# Altium PCB OK1050-C_V1.2.PcbDoc (part 1 of 3)
Units mm, origin at the board's own origin, x right, y up, seen from the top; angles counter-clockwise.
Board outline 103.88 x 80.73 mm, 2 copper layers (Component Side, Bottom Layer), stack 0.325 mm thick; 231 components, 276 nets, 1026 pads, 717 vias.
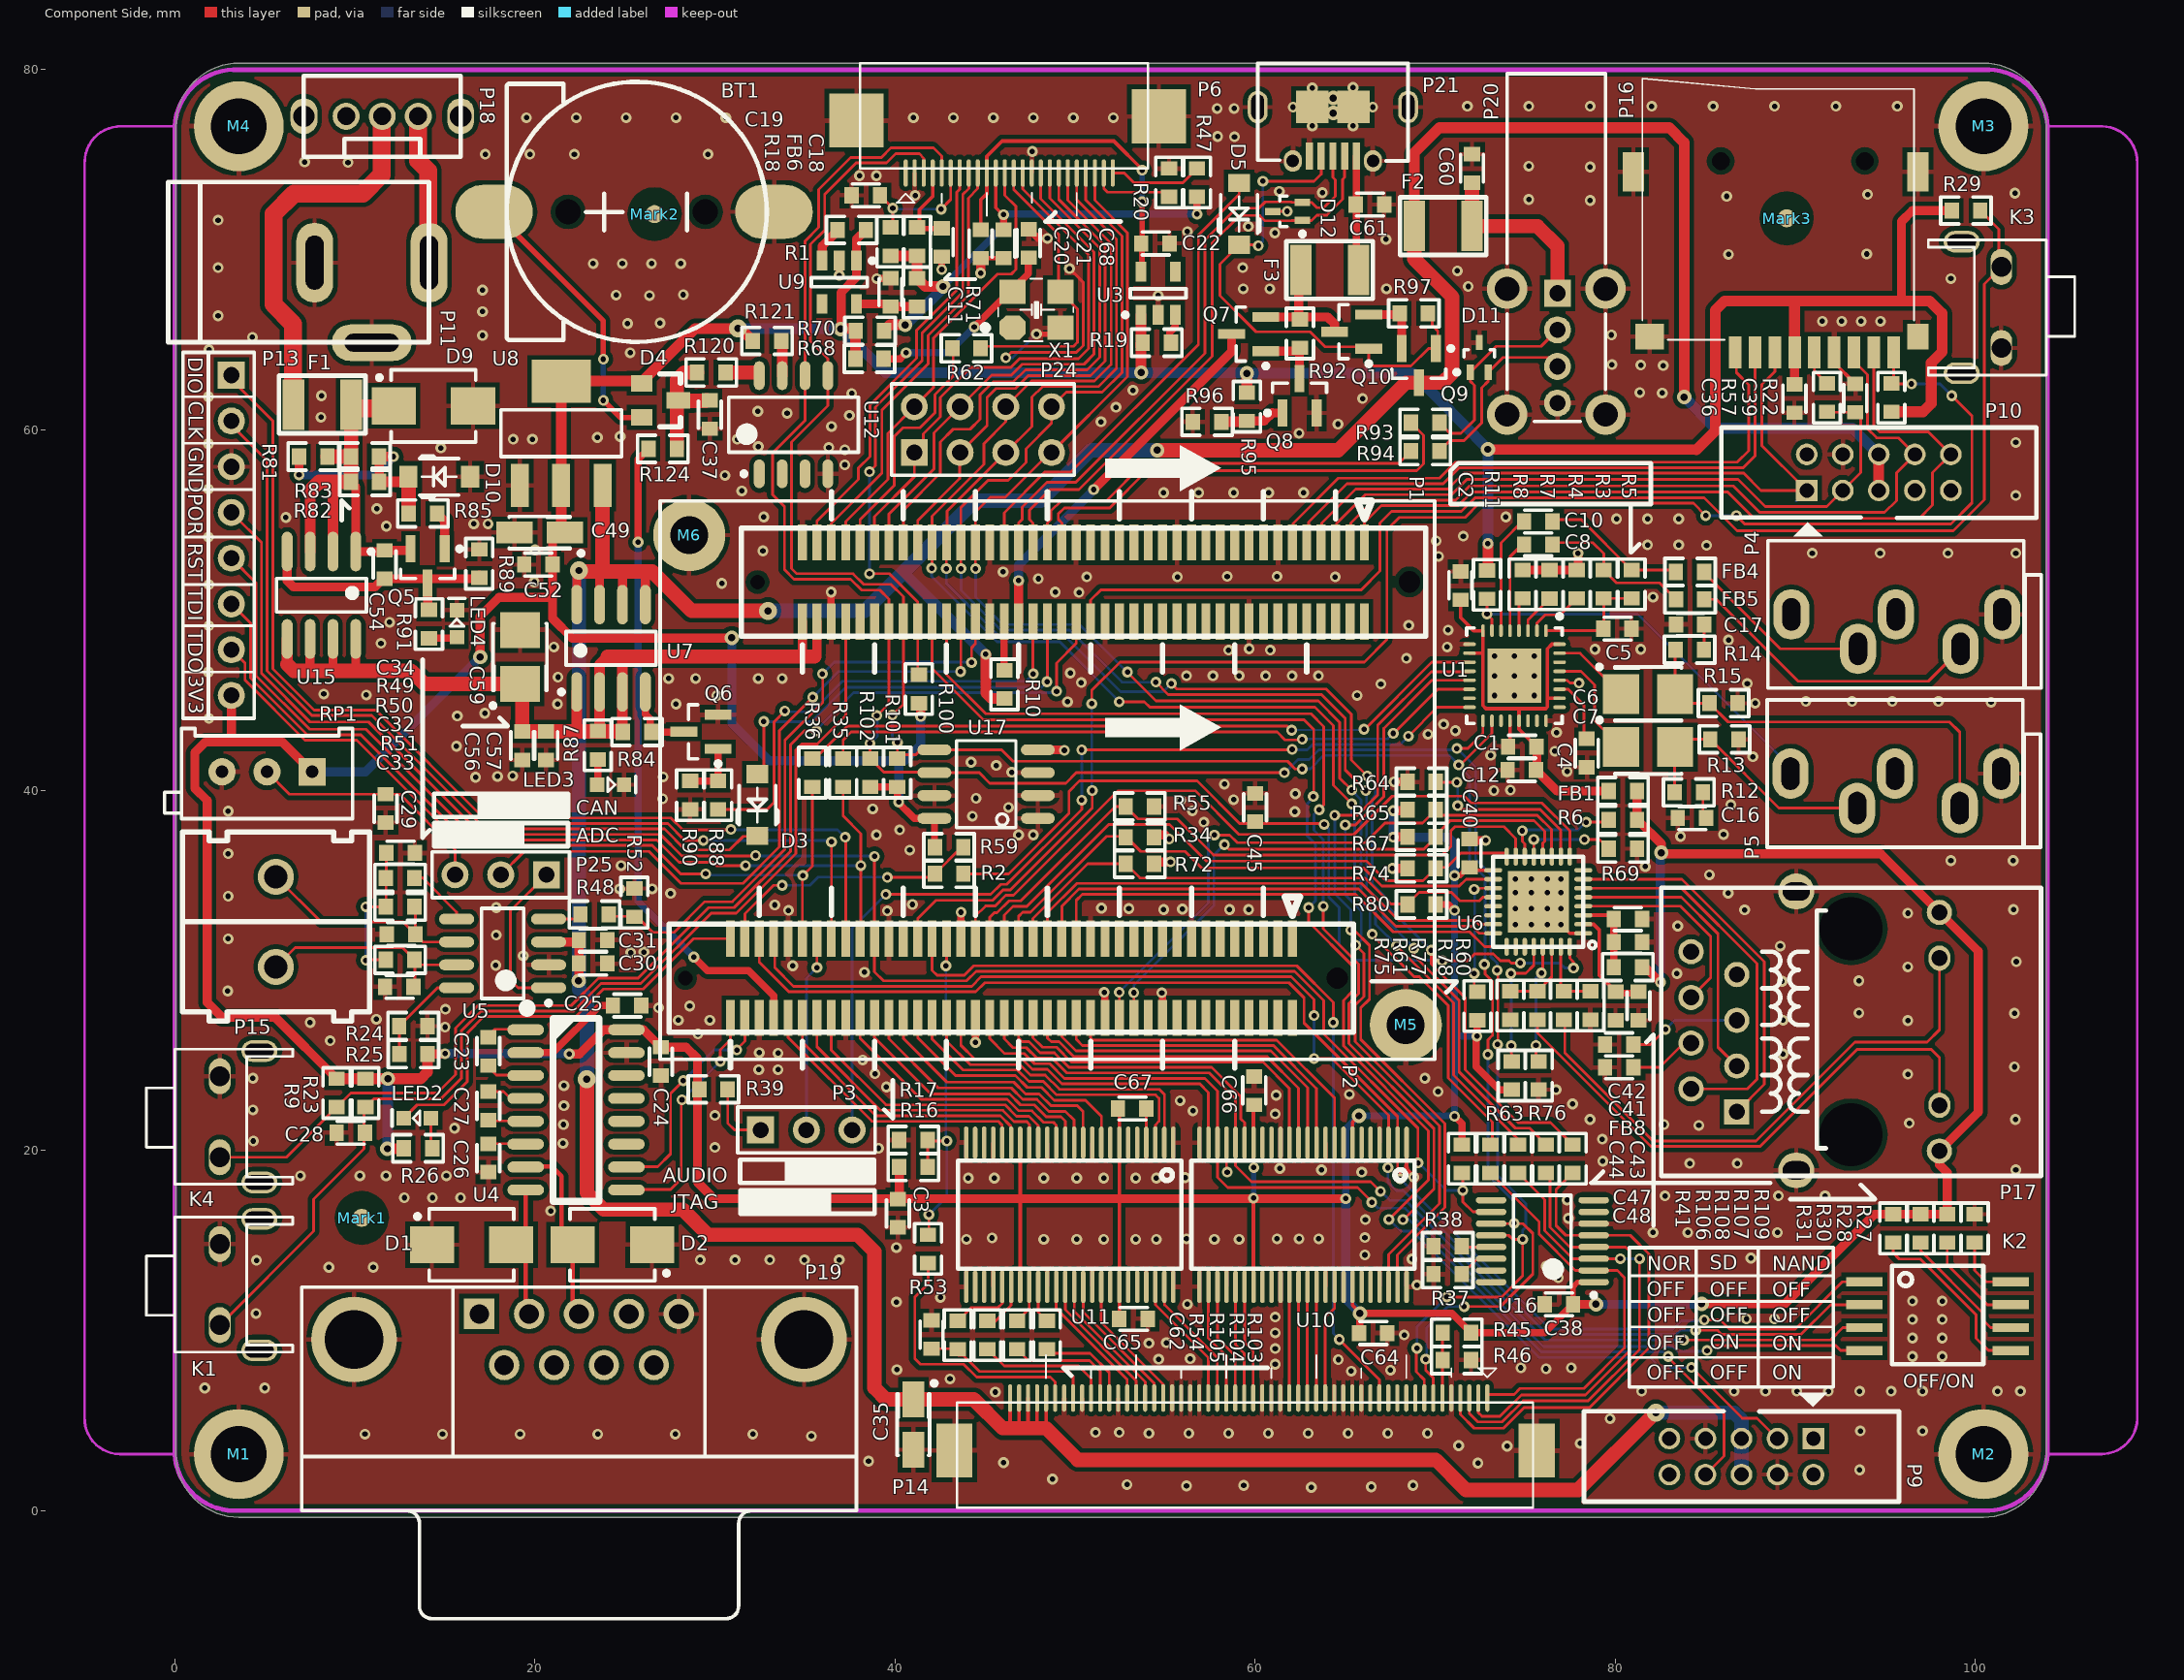
[diagram p0: Component Side view]
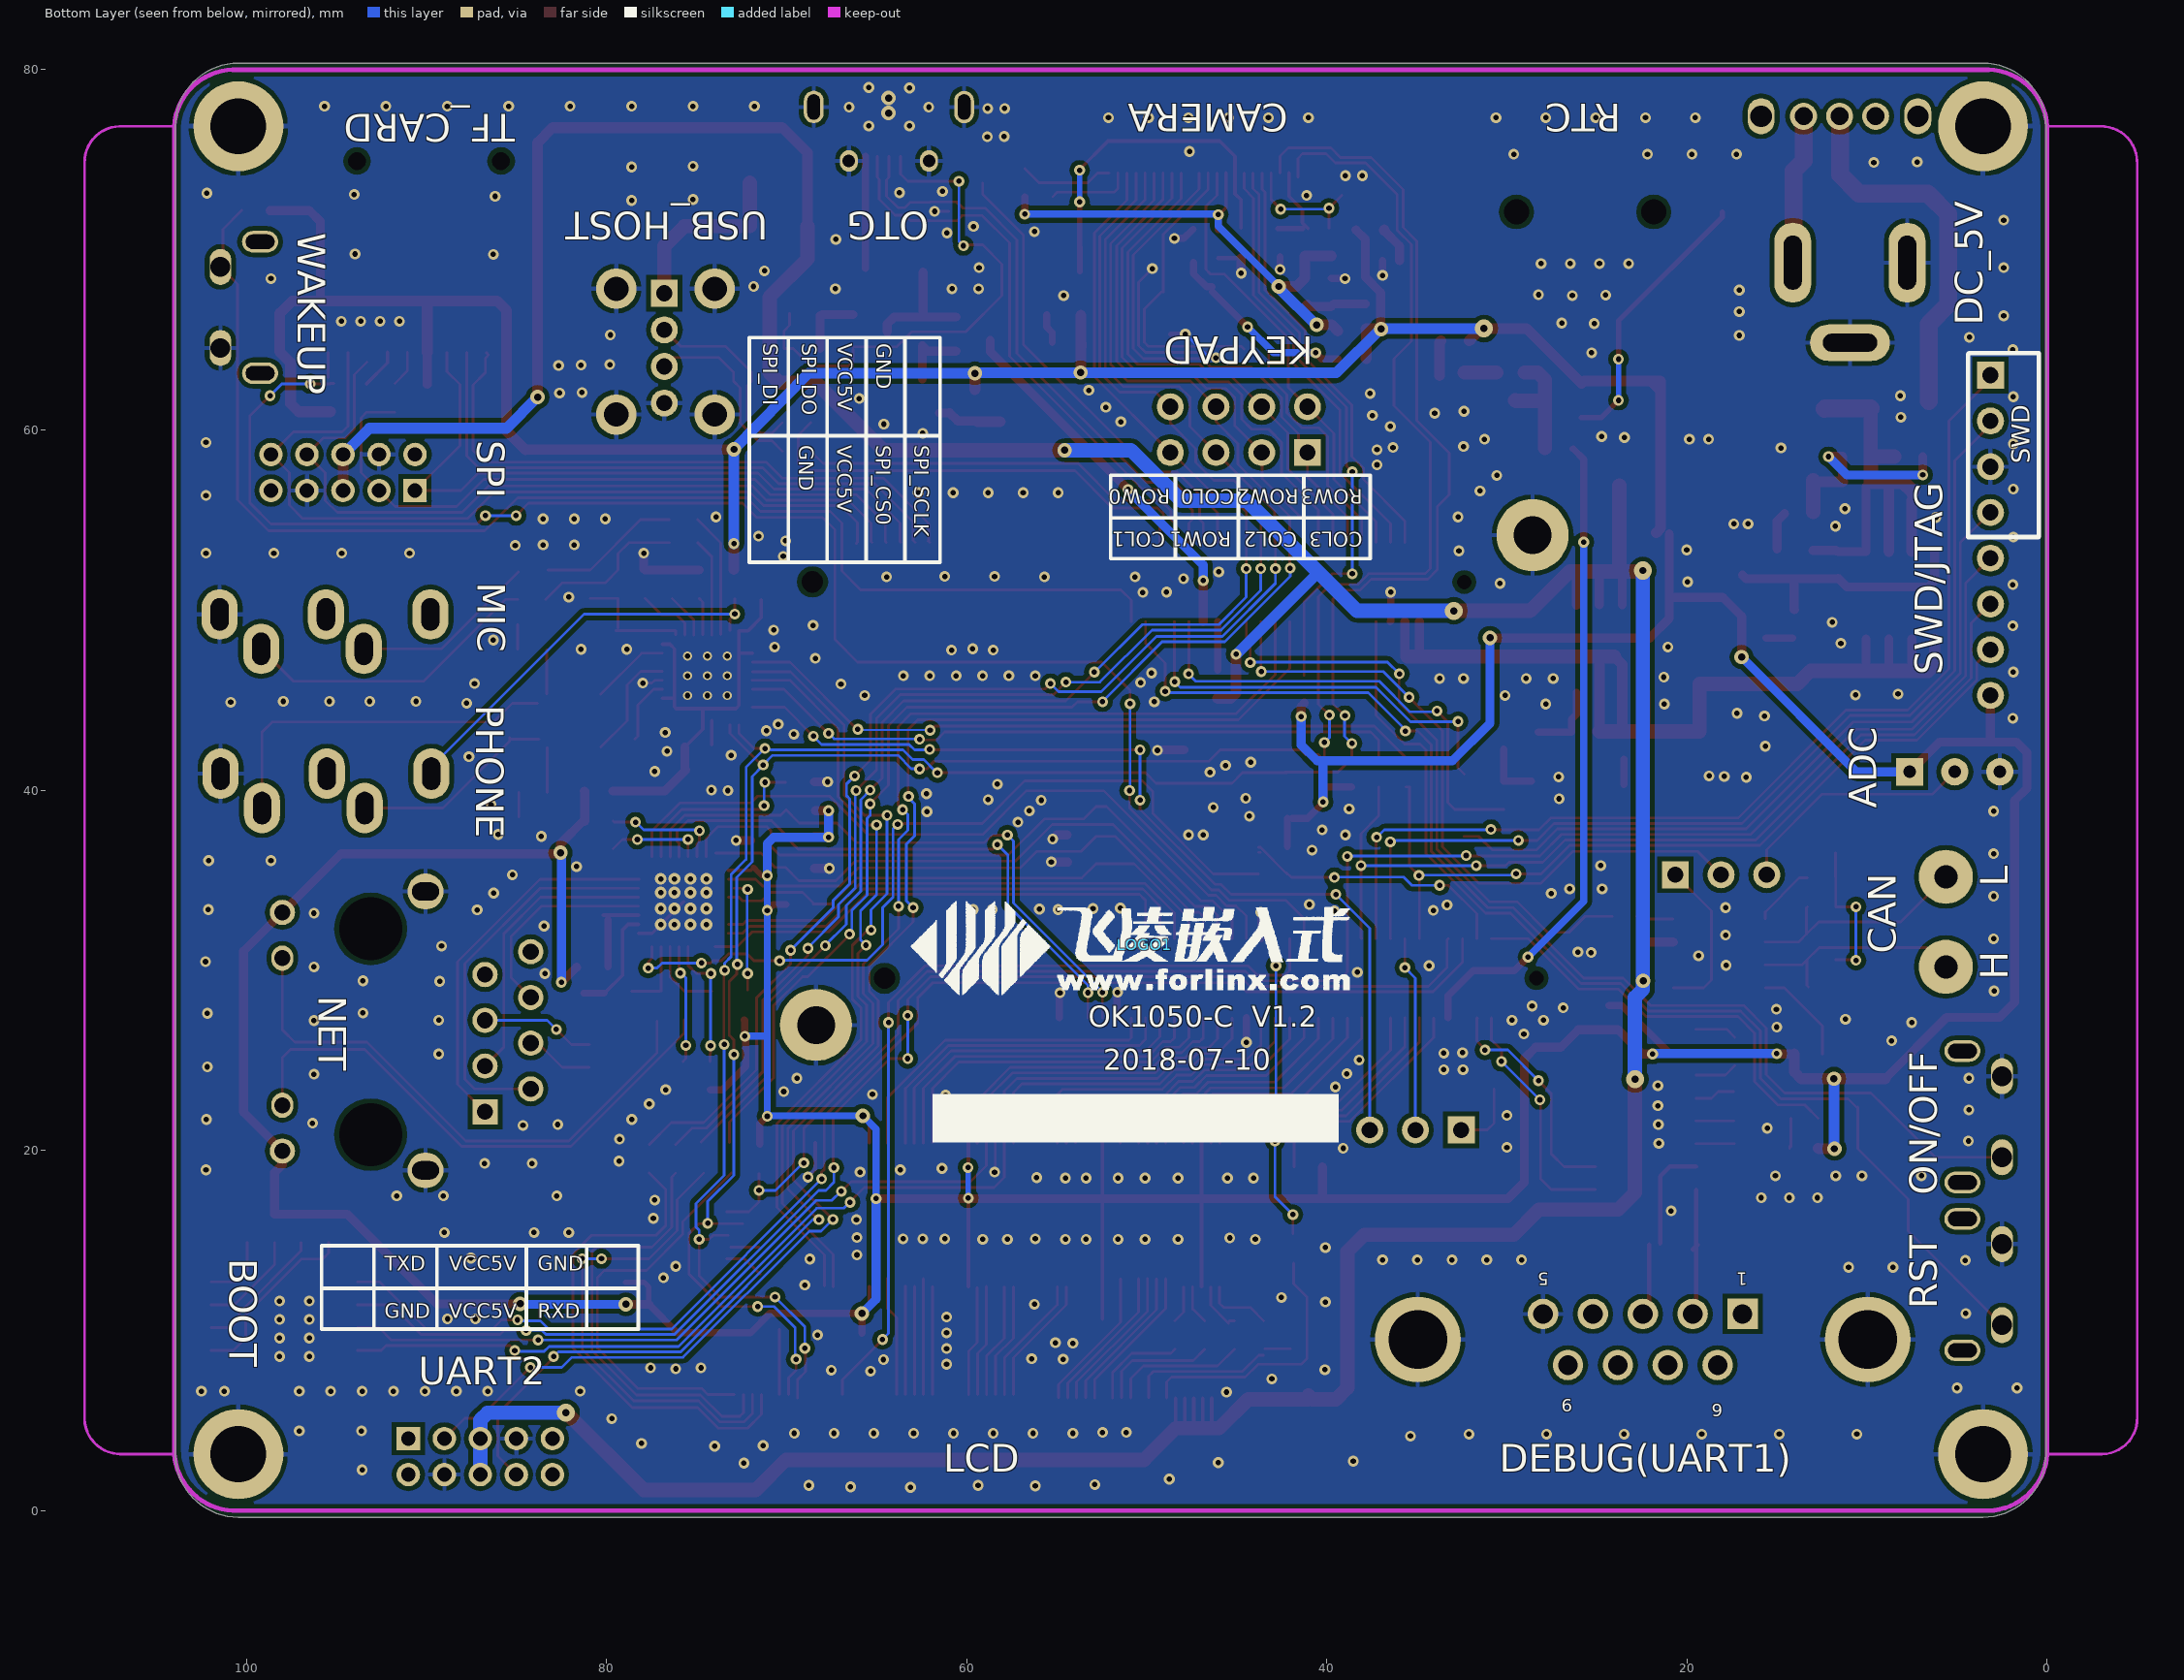
[diagram p1: Bottom Layer view, seen from below]
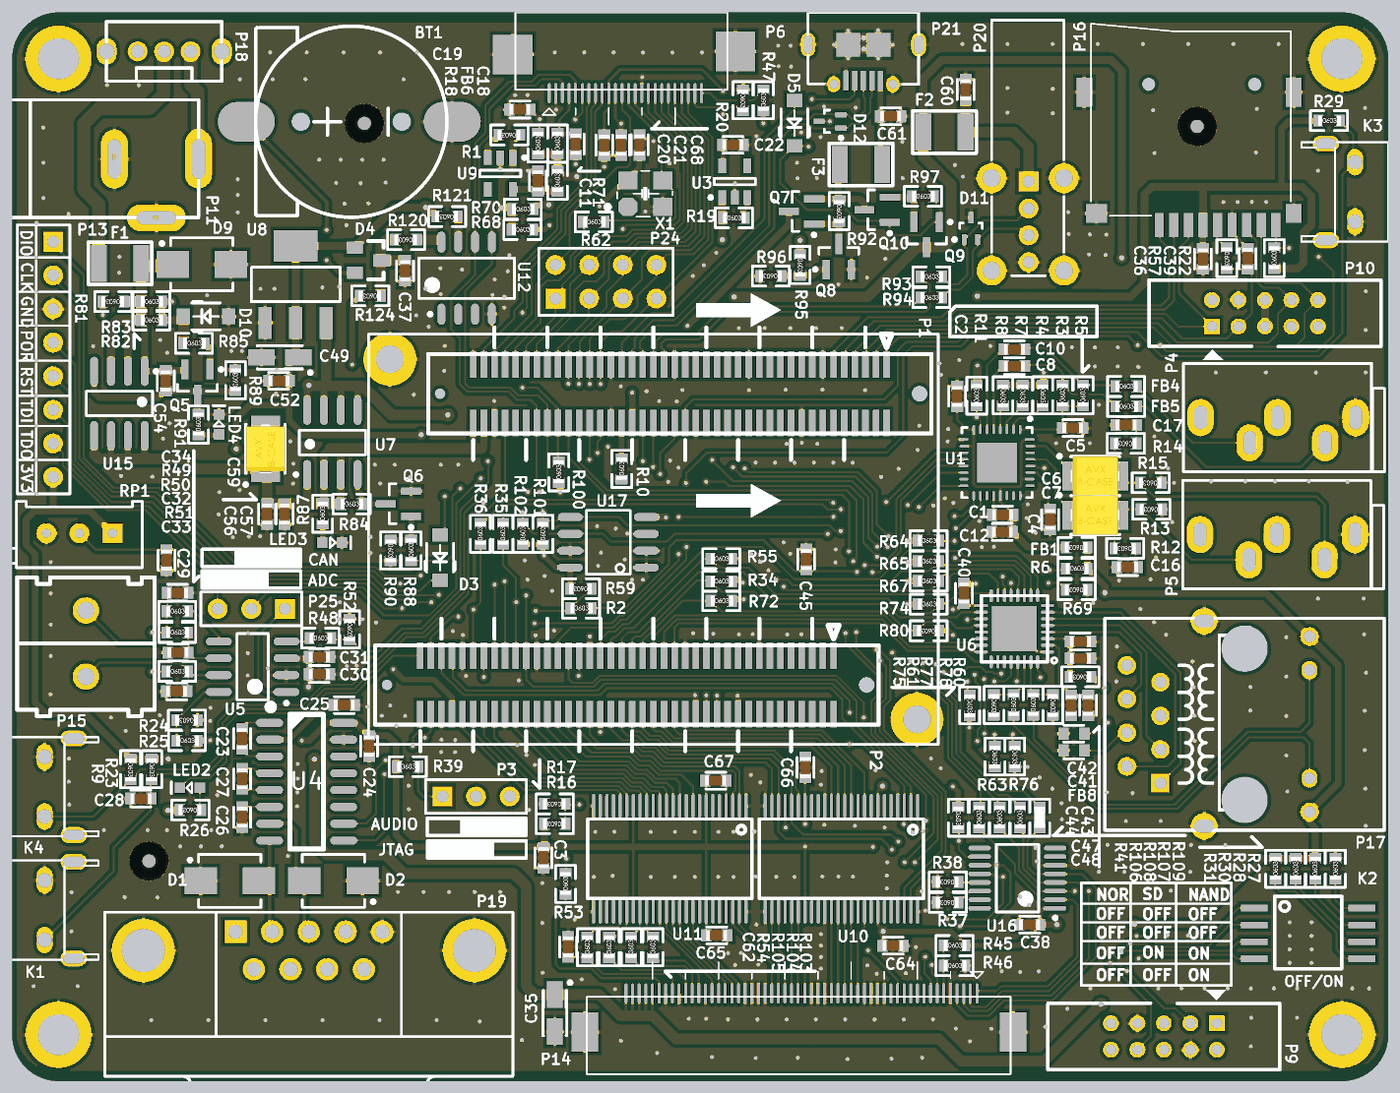
[diagram p4: 3D render of the assembled board from above, using the file's embedded part models]

## Layer stack, top to bottom
Top Solder: solder mask 0.0102, Solder Resist, Dk 3.5
Component Side: signal copper 0.0356
Dielectric 1: core 0.254, FR-4, Dk 4.2
Bottom Layer: signal copper 0.0356
Solder Side: solder mask 0.0102, Solder Resist, Dk 3.5

## Board outline
0.06,3.135 ccw(c3.56,3.135) 3.56,-0.365 100.44,-0.365 ccw(c100.44,3.135) 103.94,3.135 103.94,76.865 ccw(c100.44,76.865) 100.44,80.365 3.56,80.365 ccw(c3.56,76.865) 0.06,76.865

## Design rules (kind name [scope] priority, off if disabled: settings)
Clearance Clearance_2 [InPolygon] p1: gap=0.254 ignorepadtopadclearanceinfootprint=FALSE except(0: Arc-Hole Track-Hole SMDPad-Hole THPad-Hole Via-Hole Fill-Hole Poly-Hole Region-Hole Text-Hole)
Clearance Clearance_1 [All] p2: gap=0.152 ignorepadtopadclearanceinfootprint=FALSE except(0: Arc-Hole Track-Hole SMDPad-Hole THPad-Hole Via-Hole Fill-Hole Poly-Hole Region-Hole Text-Hole)
ComponentClearance [All] p1: gap=0 collisioncheckmode=3 verticalgap=0 showdistances=FALSE
DiffPairsRouting [All] p1: maxlimit=0.254 minlimit=0.254 mostfreqgap=0.254 toplayer_minwidth=0.152 toplayer_maxwidth=0.381 toplayer_prefwidth=0.152 bottomlayer_minwidth=0.152 bottomlayer_maxwidth=0.381 bottomlayer_prefwidth=0.152 maxuncoupledlength=12.7
HoleSize [All] p1: absolutevalues=TRUE maxlimit=5.08 minlimit=0.025 maxpercent=80.000 minpercent=20.000
HoleToHoleClearance [All] p1: gap=0.4 allowstackedmicrovias=TRUE
MinimumSolderMaskSliver [All] p1: minsoldermaskwidth=0
PolygonConnect PolygonConnect_1 [IsPad] p1: connectstyle=Relief reliefconductorwidth=0.254 reliefentries=4 polygonreliefangle="90 Angle" airgapwidth=0.254
PolygonConnect [All] p2: connectstyle=Direct reliefconductorwidth=0.254 reliefentries=4 polygonreliefangle="90 Angle" airgapwidth=0.254
RoutingVias [All] p1: holewidth=0.3 width=0.6 viastyle="Through Hole" minholewidth=0.3 minwidth=0.6 maxholewidth=0.8 maxwidth=10
SilkToSilkClearance [All] p1: silktosilkclearance=0
SilkToSolderMaskClearance [IsPad] p1: minsilkscreentomaskgap=0 clearancetoexposedcopper=TRUE
SolderMaskExpansion [All] p1: expansion=0.05
Width Width_5 [OnLayer('Top Overlay')] p1: maxlimit=0.3 minlimit=0.2 preferedwidth=0.2
Width Width_4 [All] p2: maxlimit=1.52 minlimit=0.152 preferedwidth=0.152
Width Width_3 [InNet('V_CORE5V')] p3: maxlimit=0.508 minlimit=0.254 preferedwidth=0.508
Width Width_2 [InNet('VCC1V8')] p4: maxlimit=0.508 minlimit=0.152 preferedwidth=0.254
Width Width_1 [InNet('VCC3V3')] p5: maxlimit=0.508 minlimit=0.152 preferedwidth=0.254
Width [InNet('VCC5V')] p6: maxlimit=1.25 minlimit=0.254 preferedwidth=0.508
23 further rules are at their usual default settings.

## Classes and differential pairs
differential pair class NewClass: USB2 USB_OTG
component class RT1052_TFcard: BT1 C36 C37 C39 D4 P16 R22 R57 R120 R121 R124 U12 U17
component class RT1052_Camera: C11 C18 C19 C20 C21 C22 C68 FB6 P6 R1 R18 R19 R20 R47 R62 R68 R70 R71 R100 R101 R102 U3 U9 X1
component class RT1052_Audio: C1 C2 C4 C5 C6 C7 C8 C10 C12 C16 C17 FB1 FB4 FB5 P4 P5 R3 R4 R5 R7 R8 R11 R12 R13 R14 R15 R35 R36 U1
component class RT1052_Connect: C23 C24 C25 C26 C27 C28 D1 D2 K1 K2 K3 K4 LED2 LOGO1 M1 M2 M3 M4 M5 M6 Mark1 Mark2 Mark3 P1 P2 P9 P10 P19 P24 R9 R10 R23 R26 R27 R28 R29 R30 R31 U4
component class RT1052_NET: C40 C41 C42 C43 C44 C45 C47 C48 FB8 P17 R2 R6 R34 R55 R59 R60 R61 R63 R64 R65 R67 R69 R72 R74 R75 R76 R77 R78 R80 U6
component class RT1052_Lcd: C3 C29 C30 C31 C32 C33 C34 C35 C38 C62 C64 C65 C66 C67 D3 P3 P13 P14 P15 P25 R16 R17 R24 R25 R37 R38 R39 R41 R45 R46 R48 R49 R50 R51 R52 R53 R54 R103 R104 R105 R106 R107 R108 R109 RP1 U5 U10 U11 U16
component class RT1052_Usb: C49 C52 C54 C56 C57 C58 C59 C60 C61 D5 D9 D10 D11 D12 F1 F2 F3 J1 LED1 LED3 LED4 P11 P18 P20 P21 Q5 Q6 Q7 Q8 Q9 Q10 R81 R82 R83 R84 R85 R87 R88 R89 R90 R91 R92 R93 R94 R95 R96 R97 U7 U8 U15
differential pair D: +D_P -D_N
differential pair USB2: +USB2_P -USB2_N
differential pair USB_OTG: +USB_OTG_P -USB_OTG_N

## Components (designator, comment, footprint, x,y, rotation, side; value= is the part's Value field where it differs from the comment)
BT1 "CR1220" "BH-1220 BATTERY" 18.038,72.111 r180 top locked
C1 "100nF" 0603C+ 74.828,42.418 r0 top
C2 "100nF" 0603C+ 71.399,51.359 r270 top
C3 "100nF" 0603C+ 40.157,16.51 r90 top
C4 "4.7uF" 0603C+ 78.41,42.062 r90 top
C5 "4.7uF" 0603C+ 80.112,48.971 r180 top
C6 "100uF" TC3528B 81.813,45.339 r0 top
C7 "100uF" TC3528B 81.813,42.393 r0 top
C8 "1uF" 0603C+ 75.717,53.645 r0 top
C10 "1uF" 0603C+ 75.717,54.915 r0 top
C11 "1uF" 0603C+ 39.751,67.64 r270 top
C12 "4.7uF" 0603C+ 74.803,41.123 r0 top
C16 "100nF" 0603C+ 84.252,38.456 r180 top
C17 "100nF" 0603C+ 84.15,49.2 r180 top
C18 "100nF" 0603C+ 42.596,70.409 r270 top
C19 "0.1uF" 0603C+ 38.379,73.025 r180 top value=4.7uF
C20 "0.1uF" 0603C+ 44.755,70.333 r270 top value=100nF
C21 "100nF" 0603C+ 46.025,70.333 r270 top
C22 "1uF" 0603C+ 54.458,70.358 r180 top
C23 "100nF" 0603C+ 17.418,25.497 r270 top
C24 "100nF" 0603C+ 27,24.943 r90 top
C25 "100nF" 0603C+ 25.121,28.042 r180 top
C26 "100nF" 0603C+ 17.418,19.578 r90 top
C27 "100nF" 0603C+ 17.418,22.474 r90 top
C28 "100nF" 0603C+ 9.779,20.98 r0 top
C29 "100nF" 0603C+ 11.709,38.989 r90 top
C30 "10uF" 0603C+ 23.241,30.378 r0 top
C31 "100nF" 0603C+ 23.241,31.674 r0 top
C32 "56pF_DNP" 0603C+ 12.573,32.004 r180 top
C33 "56pF_DNP" 0603C+ 12.471,29.083 r180 top
C34 "1nF" 0603C+ 12.548,36.525 r0 top
C35 "10uF" TC3216A 41.021,4.775 r270 top
C36 "100nF" 0603C+ 89.941,61.747 r90 top
C37 "100nF" 0603C+ 29.718,60.858 r90 top
C38 "100nF" 0603C+ 76.86,11.455 r180 top
C39 "10pF_DNP" 0603C+ 93.319,61.773 r90 top
C40 "100nF" 0603C+ 71.907,36.5 r90 top
C41 "4.7uF" 0603C+ 80.696,31.572 r0 top
C42 "100nF" 0603C+ 80.696,32.842 r0 top
C43 "2.2uF" 0603C+ 81.28,28.016 r270 top
C44 "100nF" 0603C+ 80.01,28.016 r270 top
C45 "100nF" 0603C+ 59.995,39.04 r270 top
C47 "100nF" 0603C+ 80.213,24.613 r0 top
C48 "100nF" 0603C+ 80.213,25.883 r0 top
C49 "10uF" TC3216A 20.269,54.305 r180 top
C52 "100nF" 0603C+ 20.193,52.527 r0 top
C54 "1uF_DNP" 0603C+ 11.659,52.527 r270 top
C56 "22uF" 0603C+ 19.304,42.469 r270 top
C57 "1uF" 0603C+ 20.625,42.469 r270 top
C59 "100uF" TC3528B 19.177,47.396 r90 top
C60 "100nF" 0603C+ 72.034,74.524 r270 top
C61 "100nF" 0603C+ 66.37,72.517 r180 top
C62 "22pF" 0603C+ 42.031,9.774 r90 top
C64 "100nF" 0603C+ 66.548,9.855 r180 top
C65 "100nF" 0603C+ 53.238,10.643 r180 top
C66 "100nF" 0603C+ 59.944,23.317 r270 top
C67 "100nF" 0603C+ 53.162,22.327 r180 top
C68 "100nF" 0603C+ 47.422,70.358 r270 top
D1 "SMBJ15CA" SMB/DO-214AA 16.485,14.757 r0 top
D2 "SMBJ15CA" SMB/DO-214AA 24.308,14.757 r180 top
D3 "MBR0540" DIODE1.6*2.6 32.36,40.894 r270 top
D4 "BAT54C" SOT23 26.949,61.646 r0 top
D5 "MBR0540" DIODE1.6*2.6 59.106,73.711 r270 top
D9 "SR54" SMB/DO-214AA 14.37,61.336 r0 top
D10 "MMSZ5232B" DIODE1.6*2.6 16.408,57.404 r180 top
D11 "RClamp0502B" SOT-523 72.441,64.033 r90 top
D12 "RClamp0502B" SOT-523 61.798,72.136 r180 top
F1 "3A" R_1210 8.198,61.412 r0 top
F2 "0.5A" R_1210 70.434,71.323 r0 top
F3 "0.5A" R_1210 64.135,68.885 r180 top
FB1 "120R@100MHz_500mA" 0603R+ 80.416,39.954 r0 top
FB4 "120R@100MHz_500mA" 0603R+ 84.144,52.116 r180 top
FB5 "120R@100MHz_500mA" 0603R+ 84.15,50.597 r180 top
FB6 "120R@100MHz_500mA" 0603R+ 41.224,70.46 r270 top
FB8 "120R@100MHz_500mA" 0603R+ 80.696,30.175 r0 top
K1 "6*6*5侧位带支架" SW-01 3.607,12.548 r270 top locked
K2 "SWTICH" SMD_4 93.828,12.7 r0 top locked
K3 "6*6*5侧位2脚带支架" SW-01 100.33,66.802 r90 top
K4 "6*6*5侧位2脚带支架" SW-01 3.607,21.869 r270 top locked
LED2 "LED_BULE" LED0603_M1608 13.474,21.793 r180 top
LED3 "LED_GREEN" LED0603_M1608 24.206,40.31 r0 top value=RED
LED4 "LED_RED" LED0603_M1608 15.672,49.251 r90 top value=RED
LOGO1 "LOGO" LOGO 50.114,31.394 r180 bottom
M1 "MHOLE-1" 3.2MM_HOLE#1 2.33,3.627 r0 top
M2 "MHOLE-2" 3.2MM_HOLE#2 98.063,3.78 r0 top
M3 "MHOLE-3" 3.2MM_HOLE#3 98.469,77.516 r0 top
M4 "MHOLE-4" 3.2MM_HOLE#4 1.238,77.287 r0 top
M5 "CORE1" 2.1mm_hole#1 68.351,26.961 r0 top
M6 "CORE2" 2.1mm_hole#2 21.823,55.215 r0 top
Mark1 "MARK1" "MARK POINT" 10.389,16.256 r90 top
Mark2 "MARK2" "MARK POINT" 26.645,71.984 r90 top
Mark3 "MARK3" "MARK POINT" 89.51,71.755 r90 top
P1 "LEFT" CON80 50.461,51.561 r270 top locked
P2 "RIGHT" CON80 46.461,29.561 r270 top locked
P3 "P25" HDR1X3 32.537,21.133 r0 top
P4 "MIC_PINK" "PHONEJACK SW" 101.473,49.759 r0 top value=HEDAJACK
P5 "Phone_GREEN" "PHONEJACK SW" 101.422,40.919 r0 top value=HEDAJACK
P6 "FPC24" FPC24 46.253,75.844 r180 top locked
P9 "UART2" IDC10S 91,4 r180 top locked
P10 "SPI" IDC10S 90.627,56.642 r0 top locked
P11 "PWR2.5" JACK-2.5MM_B 14.122,69.291 r90 top locked
P13 "Header 8" HDR1X8 3.15,63.043 r270 top locked
P14 "FPC54" FPC54 59.44,3.1 r0 top locked
P15 "Header 2" DG128-2P 5.625,32.69 r90 top locked
P16 "TFCARD_KMSD18" TF-CARD 88.9,69.621 r180 top locked
P17 "HR911105A" RJ-45A12 97.993,19.964 r0 top locked
P18 "P18" SW01 11.532,77.419 r0 top locked
P19 "DEBUG" DSUB1.385-2H9-M 22.454,0 r180 top
P20 "USB-V" USB-C 76.784,61.493 r90 top
P21 "MICRO_USB" microUSB 64.313,75.26 r180 top
P24 "Header 4×2" HDR2X4 41.072,58.75 r0 top locked
P25 "P25" HDR1X3 20.65,35.306 r180 top
Q5 "S8550" SOT95P245X110-3N 14.046,52.451 r270 top
Q6 "AO3416" SOT95P245X110-3N 29.225,43.246 r180 top
Q7 "AO3415" SOT95P245X110-3N 59.639,65.329 r180 top
Q8 "S8050" SOT95P245X110-3N 62.459,61.9 r90 top
Q9 "AO3415" SOT95P245X110-3N 69.088,63.576 r270 top
Q10 "AO3415" SOT95P245X110-3N 65.354,65.456 r180 top
R1 "1K" 0603R+ 37.592,71.11 r0 top
R2 "0R" 0603R+ 43.002,35.357 r180 top
R3 "2.2K" 0603R+ 79.35,51.435 r270 top
R4 "10K_DNP" 0603R+ 77.851,51.435 r90 top
R5 "2.2K" 0603R+ 80.899,51.435 r270 top
R6 "4.7K" 0603R+ 80.416,38.354 r180 top
R7 "10K_DNP" 0603R+ 76.34,51.43 r90 top
R8 "10K_DNP" 0603R+ 74.854,51.435 r90 top
R9 "10K_DNP" 0603R+ 8.992,23.19 r90 top
R10 "0R" 0603R+ 46.076,45.872 r270 top
R11 "10K" 0603R+ 72.873,51.41 r270 top
R12 "22R" 0603R+ 84.074,39.878 r0 top
R13 "1K" 0603R+ 86.055,42.824 r0 top
R14 "22R" 0603R+ 84.125,47.803 r0 top
R15 "1K" 0603R+ 86.004,44.831 r0 top
R16 "10K_DNP" 0603R+ 41.021,19.075 r0 top
R17 "10K_DNP" 0603R+ 41.021,20.574 r0 top
R18 "10K" 0603R+ 39.751,70.46 r270 top
R19 "1K" 0603R+ 54.534,64.846 r180 top
R20 "0R" 0603R+ 55.22,73.736 r90 top
R22 "4.7K" 0603R+ 95.326,61.798 r270 top
R23 "10K_DNP" 0603R+ 10.592,23.19 r90 top
R24 "10K" 0603R+ 13.254,26.905 r0 top
R25 "10K_DNP" 0603R+ 13.259,25.349 r180 top
R26 "1K" 0603R+ 13.513,20.117 r0 top
R27 "1K" 0603R+ 99.949,15.672 r270 top
R28 "1K" 0603R+ 98.425,15.672 r270 top
R29 "10K_DNP" 0603R+ 99.466,72.187 r180 top
R30 "1K" 0603R+ 96.952,15.672 r270 top
R31 "1K" 0603R+ 95.428,15.672 r270 top
R34 "1K" 0603R+ 53.594,37.389 r180 top
R35 "0R" 0603R+ 37.114,40.97 r270 top
R36 "0R" 0603R+ 35.408,40.97 r270 top
R37 "0R" 0603R+ 70.688,13.132 r0 top
R38 "0R" 0603R+ 70.688,14.681 r0 top
R39 "10K_DNP" 0603R+ 29.921,23.393 r180 top
R41 "10K_DNP" 0603R+ 71.476,19.533 r90 top
R45 "10K" 0603R+ 71.196,9.881 r180 top
R46 "10K_DNP" 0603R+ 71.196,8.357 r180 top
R47 "0R_DNP" 0603R+ 56.769,73.736 r270 top
R48 "4.7K" 0603R+ 23.317,33.096 r180 top
R49 "0R_DNP" 0603R+ 12.522,35.128 r180 top
R50 "59R" 0603R+ 12.522,33.528 r180 top
R51 "59R" 0603R+ 12.522,30.582 r180 top
R52 "10K" 0603R+ 25.527,33.757 r90 top
R53 "22R" 0603R+ 41.834,14.529 r270 top
R54 "22R" 0603R+ 43.478,9.749 r270 top
R55 "1K" 0603R+ 53.594,39.091 r180 top
R57 "0R" 0603R+ 91.745,61.798 r90 top
R59 "10K" 0603R+ 43.002,36.83 r0 top
R60 "1K" 0603R+ 78.613,28.042 r90 top
R61 "1K" 0603R+ 74.168,28.042 r90 top
R62 "0R" 0603R+ 43.967,64.541 r180 top
R63 "4.7K" 0603R+ 74.244,24.155 r90 top
R64 "6.49K" 0603R+ 69.24,40.462 r180 top
R65 "1K" 0603R+ 69.24,38.913 r180 top
R67 "1K" 0603R+ 69.24,37.414 r180 top
R68 "0R_DNP" 0603R+ 38.583,63.957 r180 top
R69 "1K" 0603R+ 80.416,36.754 r0 top
R70 "0R" 0603R+ 38.608,65.507 r180 top
R71 "0R_DNP" 0603R+ 41.224,67.64 r270 top
R72 "1K_DNP" 0603R+ 53.594,35.916 r180 top
R74 "1K" 0603R+ 69.24,35.662 r180 top
R75 "4.7K_DNP" 0603R+ 72.339,28.016 r90 top
R76 "1K" 0603R+ 75.743,24.155 r90 top
R77 "0R" 0603R+ 75.667,28.042 r270 top
R78 "0R" 0603R+ 77.14,28.042 r270 top
R80 "4.7K" 0603R+ 69.24,33.655 r0 top
R81 "1K" 0603R+ 7.696,58.522 r0 top
R82 "1K" 0603R+ 10.566,57.125 r180 top
R83 "1K" 0603R+ 10.566,58.522 r180 top
R84 "10K" 0603R+ 25.679,43.231 r180 top
R85 "1K" 0603R+ 13.786,55.367 r180 top
R87 "1K" 0603R+ 23.495,42.494 r270 top
R88 "1K" 0603R+ 30.175,39.726 r270 top
R89 "10K" 0603R+ 16.916,52.578 r270 top
R90 "100K" 0603R+ 28.626,39.726 r90 top
R91 "4.7K" 0603R+ 14.122,49.225 r270 top
R92 "10K" 0603R+ 62.484,65.354 r90 top
R93 "22R" 0603R+ 69.444,60.401 r180 top
R94 "22R" 0603R+ 69.444,58.826 r180 top
R95 "1K" 0603R+ 59.538,61.29 r90 top
R96 "10K" 0603R+ 57.328,60.452 r0 top
R97 "10K" 0603R+ 68.809,66.472 r180 top
R100 "10K" 0603R+ 41.326,45.618 r270 top
R101 "4.7K" 0603R+ 40.121,40.97 r270 top
R102 "4.7K" 0603R+ 38.617,40.97 r270 top
R103 "22R" 0603R+ 48.431,9.749 r270 top
R104 "22R" 0603R+ 46.78,9.749 r270 top
R105 "22R" 0603R+ 45.129,9.749 r270 top
R106 "0R_DNP" 0603R+ 73.057,19.533 r270 top
R107 "0R_DNP" 0603R+ 76.149,19.533 r270 top
R108 "0R_DNP" 0603R+ 74.6,19.533 r270 top
R109 "0R_DNP" 0603R+ 77.622,19.533 r270 top
R120 "4.7K" 0603R+ 29.794,63.195 r0 top
R121 "10K" 0603R+ 32.893,64.948 r0 top
R124 "4.7K_DNP" 0603R+ 27.102,58.953 r0 top
RP1 "VR-3296W" 3296W 5.131,41.021 r180 top value=10K
U1 "WM8960" WM8960 74.397,46.355 r270 top
U3 "RT9013-1.8V" SOT95P280X129-5N 54.61,67.589 r90 top
U4 "MAX3232ESE" SOIC-16N 22.295,22.296 r0 top locked
U5 "TJA1040" SOP127P600X175-8N 18.212,30.937 r180 top
U6 "KSZ8081RNBIA" QFN-32 75.717,33.807 r90 top
U7 "FDS4435" FDS4435 24.232,47.879 r90 top
U8 "LM1117-3.3" LM1117 21.565,59.919 r0 top
U9 "RT9013-2.8V_DNP" SOT95P280X129-5N 36.906,68.199 r270 top
U10 "SN74AVC16245" SN74VC16245 62.655,16.429 r180 top locked
U11 "SN74AVC16245" SN74VC16245 49.701,16.429 r180 top locked
U12 "RX8010SJ" RX8010SJ 34.366,60.292 r90 top locked
U15 "FDS4435" FDS4435 8.153,50.825 r270 top
U16 "TSC2007" TSC2007 75.946,14.961 r180 top locked
U17 "24C02" 24C04_SO8 47.93,38.432 r90 top
X1 "24MHz" CRYSTALS_3225SP 47.854,66.675 r0 top

## Footprints (in the part's own frame and the unit in brackets; to place one, negate y for a bottom-side part, rotate by r counter-clockwise, add the part's x,y. Pads: shape width x height; smd on the part's side, far side on the other; paste and mask are expansions set on the pad)
2.1mm_hole#1 [mm]
  round 4 hole 2.1: 1(0.01,0)
2.1mm_hole#2 [mm]
  round 4 hole 2.1: 1(6.748,-1.054)
3.2MM_HOLE#1 [mm]
  round 5 hole 3.1: 1(1.23,-0.492)
3.2MM_HOLE#2 [mm]
  round 5 hole 3.1: 1(2.377,-0.645)
3.2MM_HOLE#3 [mm]
  round 5 hole 3.1: 1(1.971,-0.651)
3.2MM_HOLE#4 [mm]
  round 5 hole 3.1: 1(2.322,-0.422)
24C04_SO8 [mil]
  oval 24x74 smd: 1(0,0) 2(50,0) 3(100,0) 4(150,0) 5(150,226) 6(100,226) 7(50,226) 8(0,226)
  silkscreen extent -20,48 170,178
0603C+ [mm]
  rect 0.8x0.9 smd: 1(-0.787,0) 2(0.787,0)
  silkscreen extent -0.76,-0.64 0.74,0.64, body extent -0.8,-0.41 0.8,0.39, height 0.6
0603R+ [mm]
  rect 0.8x0.9 smd: 1(-0.787,0) 2(0.787,0)
  silkscreen extent -1.4,-0.75 1.4,0.75, body extent -0.89,-0.4 0.81,0.4, height 0.56
3296W [mm]
  rect 1.52x1.52 hole 0.7: 1(-2.5,0)
  round 1.52 hole 0.7: 2(0,0) 3(2.5,0)
  silkscreen extent -4.75,-2.4 5.69,2.6
"BH-1220 BATTERY" [mm]
  oval 4.3x3 smd: 1(0.3,0) 2(-15.24,0)
  round 0 hole 1.4 unplated: 3(-3.81,0) 4(-11.43,0)
  silkscreen extent -14.84,-7.22 -0.4,7.22
CON80 [mm]
  rect 2x0.5 smd: 1(-2.2,15.6) 2(2.2,15.6) 3(-2.2,14.8) 4(2.2,14.8) 5(-2.2,14) 6(2.2,14) 7(-2.2,13.2) 8(2.2,13.2) 9(-2.2,12.4) 10(2.2,12.4) 11(-2.2,11.6) 12(2.2,11.6) 13(-2.2,10.8) 14(2.2,10.8) 15(-2.2,10) 16(2.2,10) 17(-2.2,9.2) 18(2.2,9.2) 19(-2.2,8.4) 20(2.2,8.4) 21(-2.2,7.6) 22(2.2,7.6) 23(-2.2,6.8) 24(2.2,6.8) 25(-2.2,6) 26(2.2,6) 27(-2.2,5.2) 28(2.2,5.2) 29(-2.2,4.4) 30(2.2,4.4) 31(-2.2,3.6) 32(2.2,3.6) 33(-2.2,2.8) 34(2.2,2.8) 35(-2.2,2) 36(2.2,2) 37(-2.2,1.2) 38(2.2,1.2) 39(-2.2,0.4) 40(2.2,0.4) 41(-2.2,-0.4) 42(2.2,-0.4) 43(-2.2,-1.2) 44(2.2,-1.2) 45(-2.2,-2) 46(2.2,-2) 47(-2.2,-2.8) 48(2.2,-2.8) 49(-2.2,-3.6) 50(2.2,-3.6) 51(-2.2,-4.4) 52(2.2,-4.4) 53(-2.2,-5.2) 54(2.2,-5.2) 55(-2.2,-6) 56(2.2,-6) 57(-2.2,-6.8) 58(2.2,-6.8) 59(-2.2,-7.6) 60(2.2,-7.6) 61(-2.2,-8.4) 62(2.2,-8.4) 63(-2.2,-9.2) 64(2.2,-9.2) 65(-2.2,-10) 66(2.2,-10) 67(-2.2,-10.8) 68(2.2,-10.8) 69(-2.2,-11.6) 70(2.2,-11.6) 71(-2.2,-12.4) 72(2.2,-12.4) 73(-2.2,-13.2) 74(2.2,-13.2) 75(-2.2,-14) 76(2.2,-14) 77(-2.2,-14.8) 78(2.2,-14.8) 79(-2.2,-15.6) 80(2.2,-15.6)
  round 0.5 hole 0.8 unplated: 81(0,-18.1)
  round 1 hole 1.2 unplated: 82(0,18.1)
  silkscreen extent -5,-19 5,19
CRYSTALS_3225SP [mm]
  oct 1.45x1.35 smd: 1(-1.325,-1)
  rect 1.45x1.35 smd: 2(1.325,-1) 3(1.325,1) 4(-1.325,1)
  silkscreen extent -2.98,-1.75 2.05,1.73
DG128-2P [mm]
  round 2 / inner round 2 / far side round 3 hole 1.3: 1(-2.5,0) 2(2.5,0)
  silkscreen extent -5.5,-5.2 5,5.2
DIODE1.6*2.6 [mm]
  rect 1x1.2 smd: 1(0,0) 2(3.429,0)
  silkscreen extent 0.63,-1.14 2.79,1.14
DSUB1.385-2H9-M [mm]
  rect 1.69x1.69 hole 1.09: 1(5.54,-10.92)
  round 1.69 hole 1.09: 2(2.77,-10.92) 3(0,-10.92) 4(-2.77,-10.92) 5(-5.54,-10.92) 6(4.155,-8.08) 7(1.385,-8.08) 8(-1.385,-8.08) 9(-4.155,-8.08)
  round 4.76 hole 3.26: 10(-12.495,-9.5) 11(12.495,-9.5)
  silkscreen extent -15.4,-12.4 15.4,6
FDS4435 [mm]
  oval 2.2x0.6 smd: 1(-2.425,1.905) 2(-2.425,0.635) 3(-2.425,-0.635) 4(-2.425,-1.905) 5(2.425,-1.905) 6(2.425,-0.635) 7(2.425,0.635) 8(2.425,1.905)
  silkscreen extent -2.55,-2.5 0.93,2.88, body extent -2,-2.5 2,2.5, height 1.75
FPC24 [mil]
  oval 9x60 smd: 1(222.83,62.01) 2(203.15,62.01) 3(183.46,62.01) 4(163.78,62.01) 5(144.09,62.01) 6(124.41,62.01) 7(104.72,62.01) 8(85.04,62.01) 9(65.35,62.01) 10(45.67,62.01) 11(25.98,62.01) 12(6.3,62.01) 13(-13.39,62.01) 14(-33.07,62.01) 15(-52.76,62.01) 16(-72.44,62.01) 17(-92.13,62.01) 18(-111.81,62.01) 19(-131.5,62.01) 20(-151.18,62.01) 21(-170.87,62.01) 22(-190.55,62.01) 23(-210.24,62.01) 24(-229.92,62.01)
  rect 118.11x118.11 smd: 25(-330.71,-62.01) 26(330.71,-52.68)
  silkscreen extent -307,-178 323,156
FPC54 [mil]
  oval 9x60 smd: 1(529.54,124.02) 2(509.85,124.02) 3(490.17,124.02) 4(470.48,124.02) 5(450.8,124.02) 6(431.11,124.02) 7(411.43,124.02) 8(391.74,124.02) 9(372.06,124.02) 10(352.37,124.02) 11(332.69,124.02) 12(313,124.02) 13(293.32,124.02) 14(273.63,124.02) 15(253.95,124.02) 16(234.26,124.02) 17(214.58,124.02) 18(194.89,124.02) 19(175.21,124.02) 20(155.52,124.02) 21(135.84,124.02) 22(116.15,124.02) 23(96.47,124.02) 24(76.78,124.02) 25(57.1,124.02) 26(37.41,124.02) 27(17.73,124.02) 28(-1.96,124.02) 29(-21.64,124.02) 30(-41.33,124.02) 31(-61.01,124.02) 32(-80.7,124.02) 33(-100.38,124.02) 34(-120.07,124.02) 35(-139.75,124.02) 36(-159.44,124.02) 37(-179.12,124.02) 38(-198.81,124.02) 39(-218.49,124.02) 40(-238.18,124.02) 41(-257.86,124.02) 42(-277.55,124.02) 43(-297.23,124.02) 44(-316.92,124.02) 45(-336.6,124.02) 46(-356.29,124.02) 47(-375.97,124.02) 48(-395.66,124.02) 49(-415.34,124.02) 50(-435.03,124.02) 51(-454.71,124.02) 52(-474.4,124.02) 53(-494.08,124.02) 54(-513.77,124.02)
  rect 78.74x118.11 smd: 55(637.41,9.33) 56(-635.43,9.33)
  silkscreen extent -630,-116 630,218
HDR1X3 [mm] "Connector; Header; 3 Position"
  rect 1.5x1.5 hole 0.9: 1(0,0)
  round 1.5 hole 0.9: 2(2.54,0) 3(5.08,0)
  silkscreen extent -1.27,-1.27 6.35,1.27
HDR1X8 [mm] "Connector; Header; 8 Position"
  rect 1.5x1.5 hole 0.9: 1(0,0)
  round 1.5 hole 0.9: 2(2.54,0) 3(5.08,0) 4(7.62,0) 5(10.16,0) 6(12.7,0) 7(15.24,0) 8(17.78,0)
  silkscreen extent -1.27,-1.27 19.05,1.27
HDR2X4 [mm] "Connector; Header; 4x2 Position"
  rect 1.5x1.5 hole 0.9: 1(0,0)
  round 1.5 hole 0.9: 2(0,2.54) 3(2.54,0) 4(2.54,2.54) 5(5.08,0) 6(5.08,2.54) 7(7.62,0) 8(7.62,2.54)
  silkscreen extent -1.27,-1.27 8.89,3.81
IDC10S [mm]
  rect 1.2x1.2 / inner rect 1.3x1.3 / far side rect 1.3x1.3 hole 0.8: 1(0,0)
  round 1.2 / inner round 1.3 / far side round 1.3 hole 0.8: 2(0,2) 3(2,0) 4(2,2) 5(4,0) 6(4,2) 7(6,0) 8(6,2) 9(8,0) 10(8,2)
  silkscreen extent -4.75,-2.54 12.75,3.5
JACK-2.5MM_B [mm]
  oval 4.445x2.032 hole 1 slot 3 at 0 deg: 1(0,0) 2(0,6.35)
  oval 2.032x4.445 hole 1 slot 3 at 90 deg: 3(-4.445,3.175)
  silkscreen extent -4.42,0 4.47,14.48
LED0603_M1608 [mm] "Molded Diode, 2-Leads, Body 1.9x0.8mm, IPC Medium Density"
  rect 0.8x0.8 smd: 1(-0.75,0) 2(0.75,0)
  silkscreen extent -0.15,-0.45 1.4,0.45, body extent -1,-0.5 1,0.5, height 0.9
LM1117 [mm]
  rect 1x2.4 smd: 1(2.2,-3) 2(-0.1,-3) 3(-2.4,-3)
  rect 3.3x2.4 smd: 4(-0.1,2.8)
  silkscreen extent -3.45,-1.4 3.25,1.2, body extent -3.45,-1.95 3.25,1.75, height 1.8
LOGO [mm]
  silkscreen extent -12.96,-2.77 11.37,2.41
"MARK POINT" [mm]
  round 1 smd mask+1: 0(0,0)
  Component Side pour cut-out: 0,1.5 0.35,1.45 0.5,1.4 0.8,1.25 1,1.1 1.1,1 1.25,0.8 1.35,0.65 1.4,0.5 1.45,0.35 1.5,0 1.45,-0.35 1.4,-0.5 1.25,-0.8 1,-1.1 0.8,-1.25 0.5,-1.4 0.35,-1.45 0,-1.5 -0.25,-1.45 -0.5,-1.4 -0.8,-1.25 -1.1,-1 -1.3,-0.75 -1.4,-0.5 -1.45,-0.35 -1.5,0 -1.45,0.35 -1.4,0.5 -1.3,0.75 -1.2,0.9 -0.9,1.2 -0.65,1.35 -0.5,1.4 -0.35,1.45
microUSB [mm]
  rect 0.4x1.5 smd: 1(-1.301,0.059) 2(-0.65,0.059) 3(0,0.059) 4(0.65,0.059) 5(1.301,0.059)
  oval 1x1.2 hole 0.7: 6(-2.225,0.325) 7(2.225,0.325)
  oval 1.1x1.8 hole 0.7 slot 1.4 at 90 deg: 8(4.175,-2.67) 9(-4.175,-2.674)
  rect 1.8x1.8 smd: 10(-1.151,-2.67) 10(1.151,-2.67)
  silkscreen extent -4.17,-5.1 4.18,0.32
"PHONEJACK SW" [mm]
  oval 2x2.8 hole 1 slot 1.8 at 90 deg: 1(0,0) 2(-8,-1.91) 3(-5.9,0) 4(-11.7,0) 5(-2.3,-1.91)
  silkscreen extent -13,-4.09 2.18,4.09
QFN-32 [mm]
  oval 0.25x1 smd: 1(-1.75,-2.5) 2(-1.25,-2.5) 3(-0.75,-2.5) 4(-0.25,-2.5) 5(0.25,-2.5) 6(0.75,-2.5) 7(1.25,-2.5) 8(1.75,-2.5) 17(1.75,2.5) 18(1.25,2.5) 19(0.75,2.5) 20(0.25,2.5) 21(-0.25,2.5) 22(-0.75,2.5) 23(-1.25,2.5) 24(-1.75,2.5)
  oval 1x0.25 smd: 9(2.5,-1.75) 10(2.5,-1.25) 11(2.5,-0.75) 12(2.5,-0.25) 13(2.5,0.25) 14(2.5,0.75) 15(2.5,1.25) 16(2.5,1.75) 25(-2.5,1.75) 26(-2.5,1.25) 27(-2.5,0.75) 28(-2.5,0.25) 29(-2.5,-0.25) 30(-2.5,-0.75) 31(-2.5,-1.25) 32(-2.5,-1.75)
  rect 3.4x3.4 smd: 33(0,0)
  silkscreen extent -2.6,-3.2 2.5,2.5
R_1210 [mm]
  rect 1.2x2.8 smd: 1(-1.6,0) 2(1.6,0)
  silkscreen extent -2.4,-1.6 2.4,1.6
RJ-45A12 [mm]
  rect 1.4x1.4 hole 0.9: 1(-11.25,2.18)
  round 1.4 hole 0.9: 2(-13.79,3.45) 3(-11.25,4.72) 4(-13.79,5.99) 5(-11.25,7.26) 6(-13.79,8.53) 7(-11.25,9.8) 8(-13.79,11.07) 9(0,0) 12(0,13.25)
  oval 1.2x1.4 hole 0.9: 10(0,2.54) 11(0,10.71)
  round 2 hole 1 slot 1.5 at 0 deg: 13(-7.95,14.41) 14(-7.95,-1.07)
  round 0 hole 3.5 unplated: 16(-4.9,0.91) 16(-4.9,12.34)
  silkscreen extent -15.44,-1.38 5.64,14.63
RX8010SJ [mm]
  oval 1.6x0.6 smd: 1(-2.725,1.905) 2(-2.725,0.635) 3(-2.725,-0.635) 4(-2.725,-1.905) 5(2.725,-1.905) 6(2.725,-0.635) 7(2.725,0.635) 8(2.725,1.905)
  silkscreen extent -2.85,-3.6 1.53,3.6, body extent -2,-3.6 2,3.6, height 2.65
SMB/DO-214AA [mm]
  rect 2.45x2.05 smd: 1(2.2,0) 2(-2.2,0)
  silkscreen extent -3.12,-2 2.35,2
SMD_4 [mil]
  rect 80x20 smd: 1(0,0) 2(0,-50) 3(0,-100) 4(0,-150) 5(320,-150) 6(320,-100) 7(320,-50) 8(320,0)
  silkscreen extent 60,-180 260,35
SN74VC16245 [mm]
  oval 0.25x1.8 smd: 1(-5.75,-4) 2(-5.25,-4) 3(-4.75,-4) 4(-4.25,-4) 5(-3.75,-4) 6(-3.25,-4) 7(-2.75,-4) 8(-2.25,-4) 9(-1.75,-4) 10(-1.25,-4) 11(-0.75,-4) 12(-0.25,-4) 13(0.25,-4) 14(0.75,-4) 15(1.25,-4) 16(1.75,-4) 17(2.25,-4) 18(2.75,-4) 19(3.25,-4) 20(3.75,-4) 21(4.25,-4) 22(4.75,-4) 23(5.25,-4) 24(5.75,-4) 25(5.75,4) 26(5.25,4) 27(4.75,4) 28(4.25,4) 29(3.75,4) 30(3.25,4) 31(2.75,4) 32(2.25,4) 33(1.75,4) 34(1.25,4) 35(0.75,4) 36(0.25,4) 37(-0.25,4) 38(-0.75,4) 39(-1.25,4) 40(-1.75,4) 41(-2.25,4) 42(-2.75,4) 43(-3.25,4) 44(-3.75,4) 45(-4.25,4) 46(-4.75,4) 47(-5.25,4) 48(-5.75,4)
  silkscreen extent -6.2,-3 6.2,3
SOIC-16N [mil]
  oval 80x24 smd: 1(-110.24,173.23) 2(-110.24,123.23) 3(-110.24,73.23) 4(-110.24,23.23) 5(-110.24,-26.77) 6(-110.24,-76.77) 7(-110.24,-126.77) 8(-110.24,-176.77) 9(109.76,-176.77) 10(109.76,-126.77) 11(109.76,-76.77) 12(109.76,-26.77) 13(109.76,23.23) 14(109.76,73.23) 15(109.76,123.23) 16(109.76,173.23)
  silkscreen extent -116,-202 50,229
SOP127P600X175-8N [mm] "SOP, 8-Leads, Body 4.90x3.90mm, Pitch 1.27mm, IPC Medium Density"
  oval 1.95x0.6 smd: 1(-2.55,1.905) 2(-2.55,0.635) 3(-2.55,-0.635) 4(-2.55,-1.905) 5(2.55,-1.905) 6(2.55,-0.635) 7(2.55,0.635) 8(2.55,1.905)
  silkscreen extent -2.68,-2.5 1.18,2.88, body extent -2,-2.5 2,2.5, height 1.75
SOT23 [mil]
  rect 47.24x36 smd: 1(-40,37.5) 2(-40,-37.5)
  rect 51.18x36 smd: 3(40,-0.5)
  silkscreen extent 0,-58 45,58
SOT95P245X110-3N [mm]
  rect 1.5x0.55 smd: 1(-0.95,0.95) 2(-0.95,-0.95) 3(0.95,0)
  silkscreen extent -1.07,-1.5 0.7,1.9, body extent -0.7,-1.5 0.7,1.5, height 1.1
SOT95P280X129-5N [mm]
  rect 1.1x0.6 smd: 1(-1.2,0.95) 2(-1.2,0) 3(-1.2,-0.95) 4(1.2,-0.95) 5(1.2,0.95)
  silkscreen extent -1.32,-1.55 0.25,1.95, body extent -0.9,-1.55 0.9,1.55, height 1.3
SOT-523 [mm]
  rect 0.85x0.4 smd: 1(-0.825,0.5) 2(-0.825,-0.5) 3(0.825,0)
  silkscreen extent -0.95,-0.85 0.42,1.37, body extent -0.43,-0.85 0.43,0.85, height 0.9
SW01 [mm]
  round 1.5 hole 1: 1(1.994,0) 2(-0.006,0) 3(-2.006,0)
  oval 1.5x2 hole 1.2: 4(4.35,0) 5(-4.35,0)
  silkscreen extent -4.36,-2.25 4.35,2.25
SW-01 [mm]
  oval 2x1.2 hole 1.1: 1(-2.25,-1.1) 2(2.25,-1.1)
  oval 1.2x2 hole 0.8 slot 1.6 at 90 deg: 3(3.65,1.1) 4(-3.65,1.1)
  silkscreen extent -3.75,-5.17 3.75,2.95
TC3216A [mm]
  rect 2x1.2 smd: 1(-1.4,0) 2(1.4,0)
  silkscreen extent -2.42,-0.9 1.7,1.28
TC3528B [mm]
  rect 2x2.2 smd: 1(-1.5,0) 2(1.5,0)
  silkscreen extent -2.82,-1.5 1.85,1.62, body extent -1.85,-1.46 1.85,1.47, height 2.03
TF-CARD [mm]
  round 0 hole 1 unplated: 0(-4.95,-5.313) 0(3.05,-5.313)
  rect 0.7x1.8 smd: 1(1.15,5.313) 2(0.05,5.313) 4(-1.05,5.313) 5(-2.15,5.313) 6(-3.25,5.313) 7(-4.35,5.313) 8(-5.45,5.313) 9(2.25,5.313) 11(-6.55,5.313)
  rect 1.6x1.4 smd: 3(7,4.437)
  rect 1.2x1.4 smd: 6(-7.9,4.437)
  rect 1.2x2.2 smd: 12(7.9,-4.713) 13(-7.9,-4.713)
  silkscreen extent -7.68,-9.9 7.41,4.61
TSC2007 [mm] "TSOP, 16-Leads, Body 5.00x4.40mm, Pitch 0.65mm, IPC Medium Density"
  oval 1.7x0.35 smd: 1(-2.85,2.275) 2(-2.85,1.625) 3(-2.85,0.975) 4(-2.85,0.325) 5(-2.85,-0.325) 6(-2.85,-0.975) 7(-2.85,-1.625) 8(-2.85,-2.275) 9(2.85,-2.275) 10(2.85,-1.625) 11(2.85,-0.975) 12(2.85,-0.325) 13(2.85,0.325) 14(2.85,0.975) 15(2.85,1.625) 16(2.85,2.275)
  silkscreen extent -2.98,-2.55 1.6,3.12, body extent -2.25,-2.55 2.25,2.55, height 1.2
USB-C [mm]
  rect 1.5x1.5 hole 0.9: 1(6.096,0)
  round 1.5 hole 0.9: 2(4.064,0) 3(2.032,0) 4(0,0)
  round 2.25 hole 1.35: 5(6.35,2.794) 6(-0.635,2.794) 7(-0.635,-2.667) 8(6.35,-2.667)
  silkscreen extent -1.02,-2.67 18.29,2.79
WM8960 [mm]
  oval 0.7x0.2 smd: 1(-2.5,1.75) 2(-2.5,1.25) 3(-2.5,0.75) 4(-2.5,0.25) 5(-2.5,-0.25) 6(-2.5,-0.75) 7(-2.5,-1.25) 8(-2.5,-1.75) 17(2.5,-1.75) 18(2.5,-1.25) 19(2.5,-0.75) 20(2.5,-0.25) 21(2.5,0.25) 22(2.5,0.75) 23(2.5,1.25) 24(2.5,1.75)
  oval 0.2x0.7 smd: 9(-1.75,-2.5) 10(-1.25,-2.5) 11(-0.75,-2.5) 12(-0.25,-2.5) 13(0.25,-2.5) 14(0.75,-2.5) 15(1.25,-2.5) 16(1.75,-2.5) 25(1.75,2.5) 26(1.25,2.5) 27(0.75,2.5) 28(0.25,2.5) 29(-0.25,2.5) 30(-0.75,2.5) 31(-1.25,2.5) 32(-1.75,2.5)
  rect 3x3 smd: 33(0,0)
  silkscreen extent -3.42,-2.65 2.65,2.65, body extent -2.5,-2.5 2.5,2.5, height 0.9

## Part data
BT1: library part Battery, "Multicell Battery", LatestRevisionDate=17-Jul-2002, LatestRevisionNote="Re-released for DXP Platform.", PackageDescription="Battery; 2 Leads", PackageReference=BAT-2, Published=24-Mar-1999, Publisher="Altium Limited"
C1 C2 C3 C4 C5 C8 C10 C11 C12 C16 C17 C18 C19 C20 C21 C22 C23 C24 C25 C26 C27 C28 C29 C30 C31 C32 C33 C34 C36 C37 C39 C40 C41 C42 C43 C44 C45 C47 C48 C54 C56 C57 C60 C61 C62 C64 C65 C66 C67: library part Cap, "Capacitor", LatestRevisionDate=17-Jul-2002, LatestRevisionNote="Re-released for DXP Platform.", PackageDescription="Radial Cap, Thru-Hole; 2 Leads; 0.3 in Pin Spacing", PackageReference=RAD-0.3, Published=8-Jun-2000, Publisher="Altium Limited"
C6 C7 C35 C49 C59: library part "Cap Pol1", "Polarized Capacitor (Radial)", LatestRevisionDate=17-Jul-2002, LatestRevisionNote="Re-released for DXP Platform.", PackageDescription="Polarized Capacitor (Radial); 2 Leads", PackageReference=RB7.6-15, Published=8-Jun-2000, Publisher="Altium Limited"
C38 C68: library part CAP_1
C52: library part CAP, "Capacitor", LatestRevisionDate=17-Jul-2002, LatestRevisionNote="Re-released for DXP Platform.", PackageDescription="Radial Cap, Thru-Hole; 2 Leads; 0.3 in Pin Spacing", PackageReference=RAD-0.3, Published=8-Jun-2000, Publisher="Altium Limited"
D1 D2: library part TVS
D3 D5 D9: library part Diode, "Default Diode", Code_JEDEC=DO-214-AB, LatestRevisionDate=17-Jul-2002, LatestRevisionNote="Re-released for DXP Platform.", PackageDescription="DO-214-AB/SMC; 2 C-Bend Leads; Body 7.9 x 5.9 mm, inc. leads (LxW)", PackageReference=SMC, PackageVersion=Sep-1996, Published=8-Jun-2000, Publisher="Altium Limited"
D10: library part "D Zener", "Zener Diode", LatestRevisionDate=17-Jul-2002, LatestRevisionNote="Re-released for DXP Platform.", PackageDescription="Diode, Thru-Hole; 2 Leads; 0.7 in Pin Spacing", PackageReference=DIODE-0.7, Published=8-Jun-2000, Publisher="Altium Limited"
D11 D12: library part LCTVS
F1 F2 F3: library part "Fuse 2", "Fuse", LatestRevisionDate=17-Jul-2002, LatestRevisionNote="Re-released for DXP Platform.", PackageDescription="Thru-Hole; 2 Leads", PackageReference=PIN-W2/E2.8, Published=8-Jun-2000, Publisher="Altium Limited"
FB1 FB4 FB5 FB6: library part Inductor, "Inductor", Code_IEC=1005, Code_JEITA=0402, LatestRevisionDate=29-May-2009, LatestRevisionNote="IPC-7351 Footprint Added.", PackageDescription="Chip Inductor", PackageReference=0402-A, Published=8-Jun-2000, Publisher="Altium Limited"
FB8: library part CZ, "Inductor", Code_IEC=1005, Code_JEITA=0402, LatestRevisionDate=29-May-2009, LatestRevisionNote="IPC-7351 Footprint Added.", PackageDescription="Chip Inductor", PackageReference=0402-A, Published=8-Jun-2000, Publisher=120R@100MHz_500mA
K1 K3 K4: library part SW-PB, "Switch", LatestRevisionDate=17-Jul-2002, LatestRevisionNote="Re-released for DXP Platform.", PackageReference=SPST-2, Published=24-Mar-1999, Publisher="Altium Limited"
K2: library part SWTICH_DIP6
LED2: library part LED2, "Typical RED, GREEN, YELLOW, AMBER GaAs LED", PackageDocument=Feb-2002, BOOK="LED BLUE", LatestRevisionDate=17-Jul-2002, LatestRevisionNote="Re-released for DXP Platform.", PackageReference=3.2X1.6X1.1, Published=8-Jun-2000, Publisher="Altium Limited"
LED3 LED4: library part LED2, "Typical RED, GREEN, YELLOW, AMBER GaAs LED", LatestRevisionDate=17-Jul-2002, LatestRevisionNote="Re-released for DXP Platform.", PackageDescription="SM LED; 2 Flat Leads", PackageReference=3.2X1.6X1.1, PackageVersion=Feb-2002, Published=8-Jun-2000, Publisher="Altium Limited"
LOGO1: library part MHOLE_1
M1 M3 M4 M6: library part MHOLE-2_1
M5: library part MHOLE-2
Mark1 Mark2 Mark3: library part MHOLE
P1: library part Header40X2_left, "Header, 30-Pin, Dual row", LatestRevisionDate=17-Jul-2002, LatestRevisionNote="Re-released for DXP Platform.", Publisher="Altium Limited"
P2: library part Header40X2_right, "Header, 30-Pin, Dual row", LatestRevisionDate=17-Jul-2002, LatestRevisionNote="Re-released for DXP Platform.", Publisher="Altium Limited"
P3 P18 P25: library part CON3
P4 P5: library part "Phonejack Stereo SW"
P6: library part CON24
P9 P10: library part "Header 5X2", "Header, 5-Pin, Dual row", LatestRevisionDate=17-Jul-2002, LatestRevisionNote="Re-released for DXP Platform.", Publisher="Altium Limited"
P13: "Header, 8-Pin", LatestRevisionDate=17-Jul-2002, LatestRevisionNote="Re-released for DXP Platform.", Publisher="Altium Limited"
P16: library part SDCARD_KMSD18
P19: library part "D Connector 9", "Receptacle Assembly, 9 Position, Right Angle", PackageDocument=O, DatasheetDocument=1-Sep-1999, Gender=Receptacle, LatestRevisionDate=17-Jul-2002, LatestRevisionNote="Re-released for DXP Platform.", Orientation="Right Angle", PackageReference=788750, Positions=9, Published=15-Jun-2001, Publisher="Altium Limited"
P21: "Header, 5-Pin, Dual row", LatestRevisionDate=17-Jul-2002, LatestRevisionNote="Re-released for DXP Platform.", Publisher="Altium Limited"
Q5: library part PNP, "NPN Bipolar Transistor", Code_JEDEC=TO-226-AA, LatestRevisionDate=17-Jul-2002, LatestRevisionNote="Re-released for DXP Platform.", PackageDescription="TO, Flat Index; 3 In-Line, Axial Leads; Body Dia. 4.8mm; Leads 0.55 x 0.51 mm (max)", PackageReference=TO-226-AA, Published=8-Jun-2000, Publisher="Altium Limited"
Q6: library part NMOS, "N-Channel Power MOSFET", ComponentLink1Description="Manufacturer Link", ComponentLink1URL=http://www.irf.com/, DatasheetVersion=PD-9.814, LatestRevisionDate=17-Jul-2002, LatestRevisionNote="Re-released for DXP Platform.", Note="Pin 2 is electrically connected to pin 4.", PackageDescription="TO, Thru-Hole, Vertical, Heatsink Mounted; 3 In-Line Leads; Pitch 2.54 mm", PackageReference=TO-220AB, PackageVersion=Feb-1997, Published=8-Jun-2000, Publisher="Altium Limited"
Q7 Q9 Q10: library part PMOS, "N-Channel Power MOSFET", ComponentLink1Description="Manufacturer Link", ComponentLink1URL=http://www.irf.com/, DatasheetVersion=PD-9.814, LatestRevisionDate=17-Jul-2002, LatestRevisionNote="Re-released for DXP Platform.", Note="Pin 2 is electrically connected to pin 4.", PackageDescription="TO, Thru-Hole, Vertical, Heatsink Mounted; 3 In-Line Leads; Pitch 2.54 mm", PackageReference=TO-220AB, PackageVersion=Feb-1997, Published=8-Jun-2000, Publisher="Altium Limited"
Q8: library part NPN, "NPN Bipolar Transistor", Code_JEDEC=TO-226-AA, LatestRevisionDate=17-Jul-2002, LatestRevisionNote="Re-released for DXP Platform.", PackageDescription="TO, Flat Index; 3 In-Line, Axial Leads; Body Dia. 4.8mm; Leads 0.55 x 0.51 mm (max)", PackageReference=TO-226-AA, Published=8-Jun-2000, Publisher="Altium Limited"
R1 R2 R3 R4 R5 R6 R7 R8 R9 R10 R11 R12 R13 R14 R15 R16 R17 R18 R19 R20 R22 R23 R24 R25 R26 R27 R28 R29 R30 R31 R34 R35 R36 R37 R38 R39 R41 R45 R46 R47 R48 R49 R50 R51 R52 R53 R54 R55 R57 R59 R60 R61 R62 R63 R64 R65 R67 R68 R69 R70 R71 R72 R74 R75 R76 R77 R78 R80 R81 R82 R83 R84 R85 R87 R88 R89 R90 R91 R92 R93 R94 R95 R96 R97 R100 R101 R102 R103 R104 R105 R106 R107 R108 R109 R120 R121 R124: library part Res3, "Resistor", LatestRevisionDate=29-May-2009, LatestRevisionNote="IPC-7351 Footprint Added.", PackageDescription="Chip Resistor", PackageReference=J1-0603, Published=8-Jun-2000, Publisher="Altium Limited"
RP1: library part VR
U3 U9: library part RT9013
U4: library part MAX3232
U6: library part KSZ8081RNB
U8: library part LM1117
U17: library part 24C04_SO8
X1: library part oscillator_4PINsp

## Via types
v1: diameter 0.6, hole 0.3, Component Side to Bottom Layer, tented both sides, 667 vias
v2: diameter 0.8, hole 0.4, Component Side to Bottom Layer, tented both sides, 20 vias
v3: diameter 0.66, hole 0.3, Component Side to Bottom Layer, tented both sides, 16 vias
v4: diameter 0.5, hole 0.3, Component Side to Bottom Layer, tented both sides, 9 vias
v5: diameter 1, hole 0.4, Component Side to Bottom Layer, tented both sides, 5 vias

## Nets (pads, with @x,y where several pads share a name; then routed paths per layer and width w, separated by ;. In a path a pad name is that pad's centre, name@x,y a point inside that pad or via, vN(x,y) a via of type N, cw(c..) or ccw(c..) an arc to the next point about the centre after c; other vN are vias at no path point)
A2_SEMC_CKE: P2.2
A3_SEMC_A12: P2.6
A4_SEMC_A8: P2.10
A5_SEMC_A7: P2.12
A6_SEMC_A4: P2.16
A7_ENET_MDC: P2.24 R67.1 U6.12 | length 31.8
  Component Side w0.152: P2.24@53.261,27.361 v1(53.261,28.758) ; v1@58.293,36.957 58.527,36.723 69.362,36.723 R67.1@70.028,37.389 ; R67.1@70.117,37.579 70.841,38.303 ; 70.815,38.303 70.841,38.303 ; U6.12@75.971,36.297 75.971,37.059 76.073,37.16 76.073,37.719 75.489,38.303 70.841,38.303
  Bottom Layer w0.152: v1(53.261,28.758) 53.261,29.157 57.709,33.604 57.709,36.398 v1(58.293,36.982)
A8_LCDIF_DATA02: P2.34 U10.12 | length 18.9
  Component Side w0.152: P2.34@49.261,27.361 49.261,26.3 50.041,25.52 60.866,25.52 62.905,23.48 U10.12@62.905,20.403
A9_LCDIF_DATA03: P2.36 U10.13 | length 19.3
  Component Side w0.152: P2.36@48.461,27.361 48.461,26.24 48.671,26.03 49.101,26.03 49.916,25.216 60.636,25.216 62.405,23.447 U10.13@62.405,20.403
A10_LCDIF_DATA07/BT_CFG_7: K2.4 P2.44 U10.22 | length 60
  Component Side w0.152: P2.44@45.261,27.361 45.261,26.214 46.101,25.375 47.186,25.375 47.746,24.814 48.59,24.814 49.404,24 57.204,24 57.912,23.292 U10.22@57.912,20.371 ; U10.22@57.905,20.429 57.905,18.498 58.471,17.932 65.684,17.932 v1@66.599,17.018 ; v1(85.09,8.89) 85.364,9.164 92.232,9.164 92.507,8.89 K2.4@93.828,8.89
  Bottom Layer w0.152: v1@66.599,17.018 66.827,16.789 68.326,16.789 75.997,9.119 83.185,9.119 83.464,8.839 85.039,8.839 v1(85.09,8.89)
  other v1: 66.472,17.12
A11_LCDIF_DATA12: P2.56 U11.11 | length 14.5
  Component Side w0.152: P2.56@40.461,27.361 40.461,26.214 42.88,23.795 46.589,23.795 47.244,23.139 48.006,23.139 48.666,22.479 50.114,22.479 50.444,22.149 U11.11@50.444,20.422
A12_ENET_TX_D1: P2.31 U6.25 | length 27.4
  Component Side w0.152: P2.31@50.061,31.761 50.061,33.881 50.394,34.214 65.583,34.214 67.666,32.131 71.907,32.131 72.731,31.307 U6.25@73.967,31.307
A13_ENET_TX_EN: P2.35 U6.23 | length 27.8
  Component Side w0.152: P2.35@48.461,31.761 48.461,33.196 50.087,34.822 65.915,34.822 67.97,32.766 72.212,32.766 72.421,32.557 U6.23@73.217,32.557
AUD_3V3: C1.2 C2.2 C12.2 FB1.1 U1.8 U1.10 U1.21 U1.26 U1.32 | length 24
  Component Side w0.2: C2.2@71.399,50.571 71.399,49.581 72.125,48.855 U1.8@72.647,48.855 72.645,48.853 72.645,47.605 ; U1.10@71.897,47.605 72.645,47.605 ; 74.647,44.522 U1.21@74.647,43.855 74.647,43.387 C1.2@75.616,42.418 C1.2@75.641,42.393 ; 76.296,45.105 U1.26@76.897,45.105 ; U1.32@76.897,48.105 76.477,48.105 76.225,47.854 76.225,44.628 76.124,44.526 72.822,44.526 72.645,44.703 72.645,47.605
  Component Side w0.5: C12.2@75.59,41.123 76.759,39.954 FB1.1@79.654,39.954 ; C12.2@75.641,41.173 C1.2@75.641,42.393
B1_SEMC_A6: P2.5
B2_SEMC_A9: P2.1
B3_SEMC_CLK: P2.4
B4_SEMC_A11: P2.8
B6_SEMC_A5: P2.14
B7_SEMC_DQS: P2.22
B8_LCDIF_DATA01: P2.32 U10.11 | length 18.7
  Component Side w0.152: P2.32@50.061,27.361 50.061,26.164 50.402,25.824 61.019,25.824 63.405,23.437 U10.11@63.405,20.403
B9_LCDIF_DATA04: P2.38 U10.14 | length 19.5
  Component Side w0.152: P2.38@47.661,27.361 47.661,26.253 48.188,25.726 48.975,25.726 49.79,24.912 60.432,24.912 61.9,23.444 U10.14@61.9,20.447
B11_LCDIF_DATA13: P2.58 U11.12 | length 14.6
  Component Side w0.152: P2.58@39.661,27.361 39.661,26.201 42.393,23.47 46.457,23.47 47.092,22.835 47.879,22.835 48.549,22.165 49.463,22.165 49.936,21.692 U11.12@49.936,20.396
B12_ENET_TX_D0: P2.33 U6.24 | length 27.2
  Component Side w0.152: P2.33@49.261,31.761 49.261,33.562 50.217,34.518 65.736,34.518 67.818,32.436 72.06,32.436 72.438,32.057 U6.24@73.217,32.057
B13_ENET_TX_CLK: P2.45 U6.9 | length 41.3
  Component Side w0.152: P2.45@44.461,31.761 44.461,33.006 45.034,33.579 45.568,33.579 46.152,34.163 46.584,34.163 52.391,39.971 56.676,39.971 59.1,37.547 65.487,37.547 67.609,39.669 71.608,39.669 71.984,39.294 75.921,39.294 77.467,37.747 U6.9@77.467,36.307
B14_LCD_PWM: P2.49 R16.2 R17.2 R53.1 | length 19.5
  Component Side w0.152: R17.2@41.732,20.523 R17.2@41.808,20.523 ; R16.2@41.808,19.075 R17.2@41.808,20.523 ; R17.2@41.859,20.599 41.834,20.574 41.808,20.549 R17.2@41.808,20.523 ; R53.1@41.885,15.367 v1(41.885,16.434) ; v1@42.861,30.288 P2.49@42.861,31.761 ; v1(42.875,20.523) R17.2@41.808,20.523
  Bottom Layer w0.152: v1(41.885,16.434) 42.875,17.424 v1(42.875,20.523) 42.824,20.574 v1(42.824,30.251)
C1_SEMC_BA0: P2.25
C2_SEMC_A0: P2.3
C3_SEMC_D14: P1.8
C4_SEMC_D11: P1.6
C5_SEMC_D9: P1.4
C6_SEMC_D8: P1.2
C7_ENET_MDIO: P2.26 R65.1 U6.11 | length 33.9
  Component Side w0.152: P2.26@52.461,27.361 v1@52.461,28.768 ; v1(57.734,37.51) 58.578,37.51 59.004,37.084 66.116,37.084 67.208,38.176 69.291,38.176 R65.1@70.028,38.913 R65.1@70.327,38.613 ; R65.1@70.403,38.613 75.661,38.613 76.454,37.821 U6.11@76.454,36.297
  Bottom Layer w0.152: v1(52.451,28.778) 57.404,33.731 57.404,37.18 v1(57.734,37.51)
C8_LCDIF_DATA00: P2.30 U10.9 | length 18.5
  Component Side w0.152: P2.30@50.861,27.361 50.861,26.253 50.987,26.128 61.197,26.128 64.405,22.92 U10.9@64.405,20.403
C9_LCDIF_DATA05: P2.40 U10.19 | length 17.5
  Component Side w0.152: P2.40@46.861,27.361 46.861,26.24 47.066,26.035 47.447,26.035 48.06,25.422 48.847,25.422 49.662,24.608 57.587,24.608 59.207,22.987 59.207,21.742 59.411,21.539 U10.19@59.411,20.396
C10_LCDIF_DATA08: P2.48 U10.23 | length 19.1
  Component Side w0.152: P2.48@43.661,27.361 43.661,25.833 44.425,25.07 47.061,25.07 47.62,24.51 48.464,24.51 49.278,23.696 56.924,23.696 57.404,23.216 U10.23@57.404,20.422
C11_LCDIF_DATA14: P2.60 U11.13 | length 14.8
  Component Side w0.152: P2.60@38.861,27.361 38.861,26.264 41.986,23.139 46.355,23.139 46.965,22.53 47.727,22.53 48.396,21.861 49.208,21.861 49.454,21.615 U11.13@49.454,20.396
C12_ENET_CRS: P2.39 R34.2 U6.18 | length 30.7
  Component Side w0.152: P2.39@46.861,31.761 46.861,32.993 47.092,33.223 47.523,33.223 51.74,37.44 52.807,37.44 53.645,36.601 56.109,36.601 57.023,35.687 66.015,35.687 67.031,34.671 71.323,34.671 71.71,35.057 U6.18@73.217,35.057
C13_ENET_RX_ER: P2.37 R72.2 R80.1 U6.20 | length 29.5
  Component Side w0.152: P2.37@47.661,31.761 47.661,32.878 50.698,35.916 R72.2@52.807,35.916 53.596,35.126 66.093,35.126 67.539,33.68 R80.1@68.453,33.68 ; R80.1@68.529,33.68 R80.1@68.453,33.68 ; U6.20@73.217,34.057 72.64,34.057 72.441,33.858 71.374,33.858 70.896,34.336 69.108,34.336 R80.1@68.453,33.68
C14_LCD_TPINT: P2.51 P14.13 | length 48.1
  Component Side w0.152: P2.51@42.061,31.761 42.061,29.999 42.336,29.723 43.848,29.723 44.375,30.251 62.307,30.251 64.338,28.219 v1(64.338,27.102) ; v1(64.668,9.5) 66.904,7.264 66.904,6.458 P14.13@66.89,6.445
  Bottom Layer w0.152: v1(64.338,27.102) 64.338,9.83 v1(64.668,9.5)
CAN_H: C33.1 P15.1 R51.1 U5.7 | length 12.9
  Component Side w0.152: P15.1@5.97,29.845 P15.1@5.625,30.19 6.695,31.26 12.657,31.26 R51.1@13.335,30.582 ; C33.1@13.259,29.083 13.335,29.159 R51.1@13.335,30.582 ; U5.7@15.662,30.302 13.614,30.302 R51.1@13.335,30.582
CAN_L: C32.1 P15.2 R50.1 U5.6 | length 13.1
  Component Side w0.152: P15.2@5.625,35.19 8.133,32.682 12.682,32.682 C32.1@13.36,32.004 ; R50.1@13.31,33.528 13.36,33.477 C32.1@13.36,32.004 ; U5.6@15.662,31.572 13.792,31.572 C32.1@13.36,32.004
CAN_STBY: R24.1 R25.2 U5.8 | length 5.6
  Component Side w0.152: R24.1@12.466,26.905 14.594,29.032 U5.8@15.662,29.032 ; R25.2@12.471,25.349 R24.1@12.471,26.905
CSI_VDD: C21.1 FB6.2 P6.11 R18.2 R47.2 R70.1 R71.1 | length 29.3
  Component Side w0.2: P6.11@45.593,74.269 45.593,72.339 v1@45.974,71.958
  Component Side w0.4: v2@40.564,65.786 v2(40.564,65.837) ; v1@45.974,71.958 46.025,71.907 C21.1@46.025,71.12 ; v1(56.769,71.983) R47.2@56.769,72.949
  Component Side w0.6: R70.1@39.395,65.507 39.726,65.837 v2(40.564,65.837) ; R18.2@39.751,69.672 FB6.2@41.224,69.672 R71.1@41.224,68.428 41.681,67.97 v2(42.672,67.97)
  Bottom Layer w0.4: v2(42.672,67.97) 46.025,71.324 v1(46.025,71.958) ; v1@45.974,71.958 46,71.983 v1(56.769,71.983)
  Bottom Layer w0.6: v2(40.564,65.837) 40.615,65.837 42.621,67.843 42.621,68.021 v2@42.647,68.047
D1_SEMC_WE: P2.23
D2_SEMC_RAS: P2.21
D3_SEMC_CAS: P2.27
D4_SEMC_D12: P1.12
D5_SEMC_D10: P1.10
D6_SEMC_DM1: P2.18
D7_LCDIF_CLK: P2.72 U11.20 | length 16
  Component Side w0.152: P2.72@34.061,27.361 34.061,26.264 38.71,21.615 45.729,21.615 45.949,21.396 U11.20@45.949,20.396
D8_LCDIF_VSYNC: P2.68 U11.17 | length 16.2
  Component Side w0.152: P2.68@35.661,27.361 35.661,25.756 39.191,22.227 45.978,22.227 46.613,21.592 47.319,21.592 47.473,21.438 U11.17@47.473,20.396